# Altium PCB CAMERON.PcbDoc (part 1 of 2)
Units mil, origin at the board's own origin, x right, y up, seen from the top; angles counter-clockwise.
Board outline 6000 x 4900 mil, 4 copper layers (Top, POWER, GND, Bottom), stack 33.234 mil thick; 130 components, 113 nets, 631 pads, 154 vias.
Unrouted connection lines stored in the file: 5.
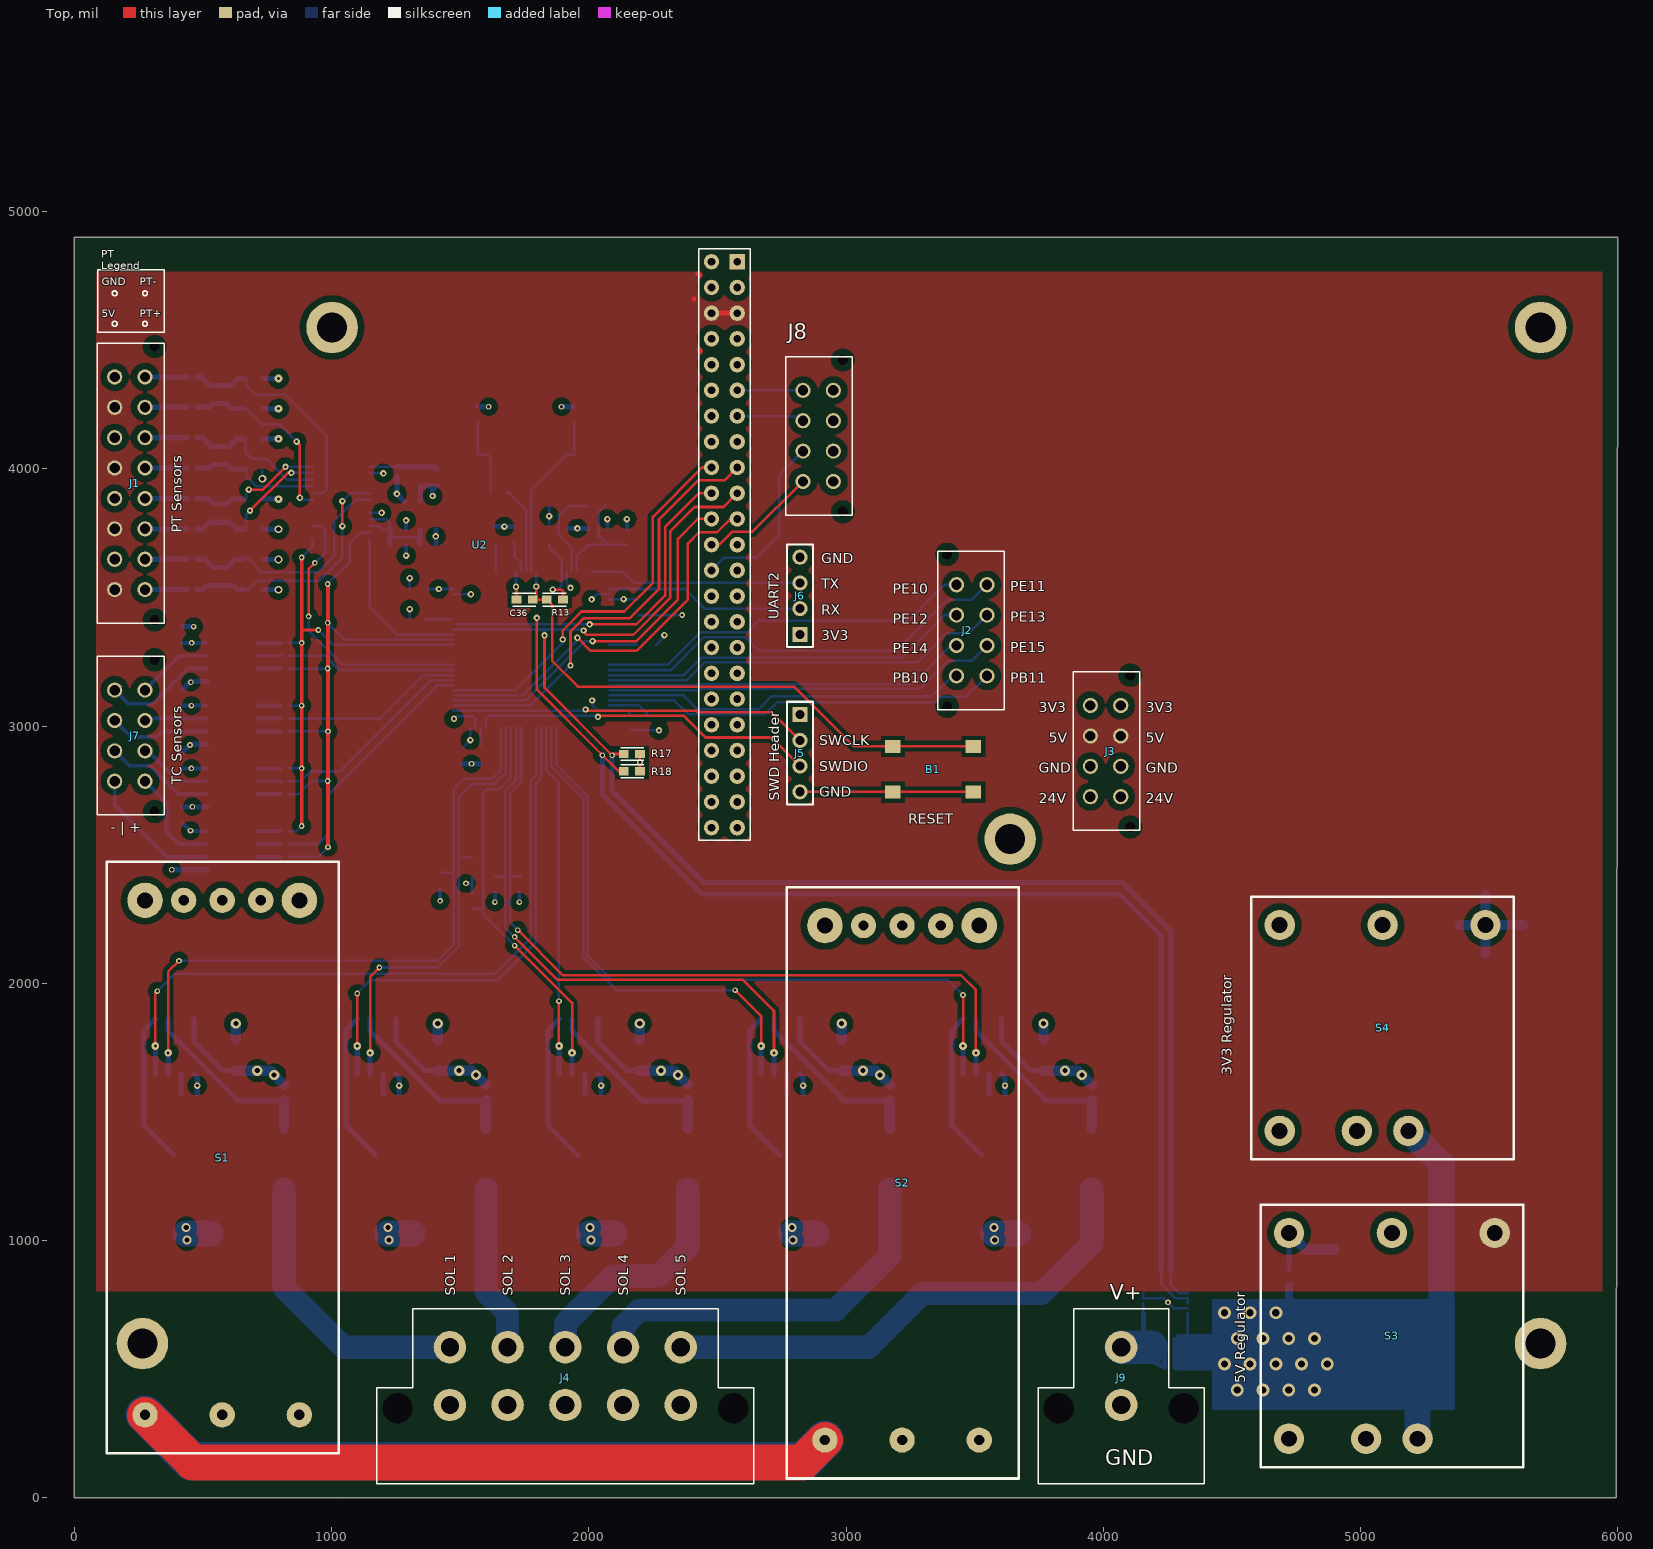
[diagram p0: Top view]
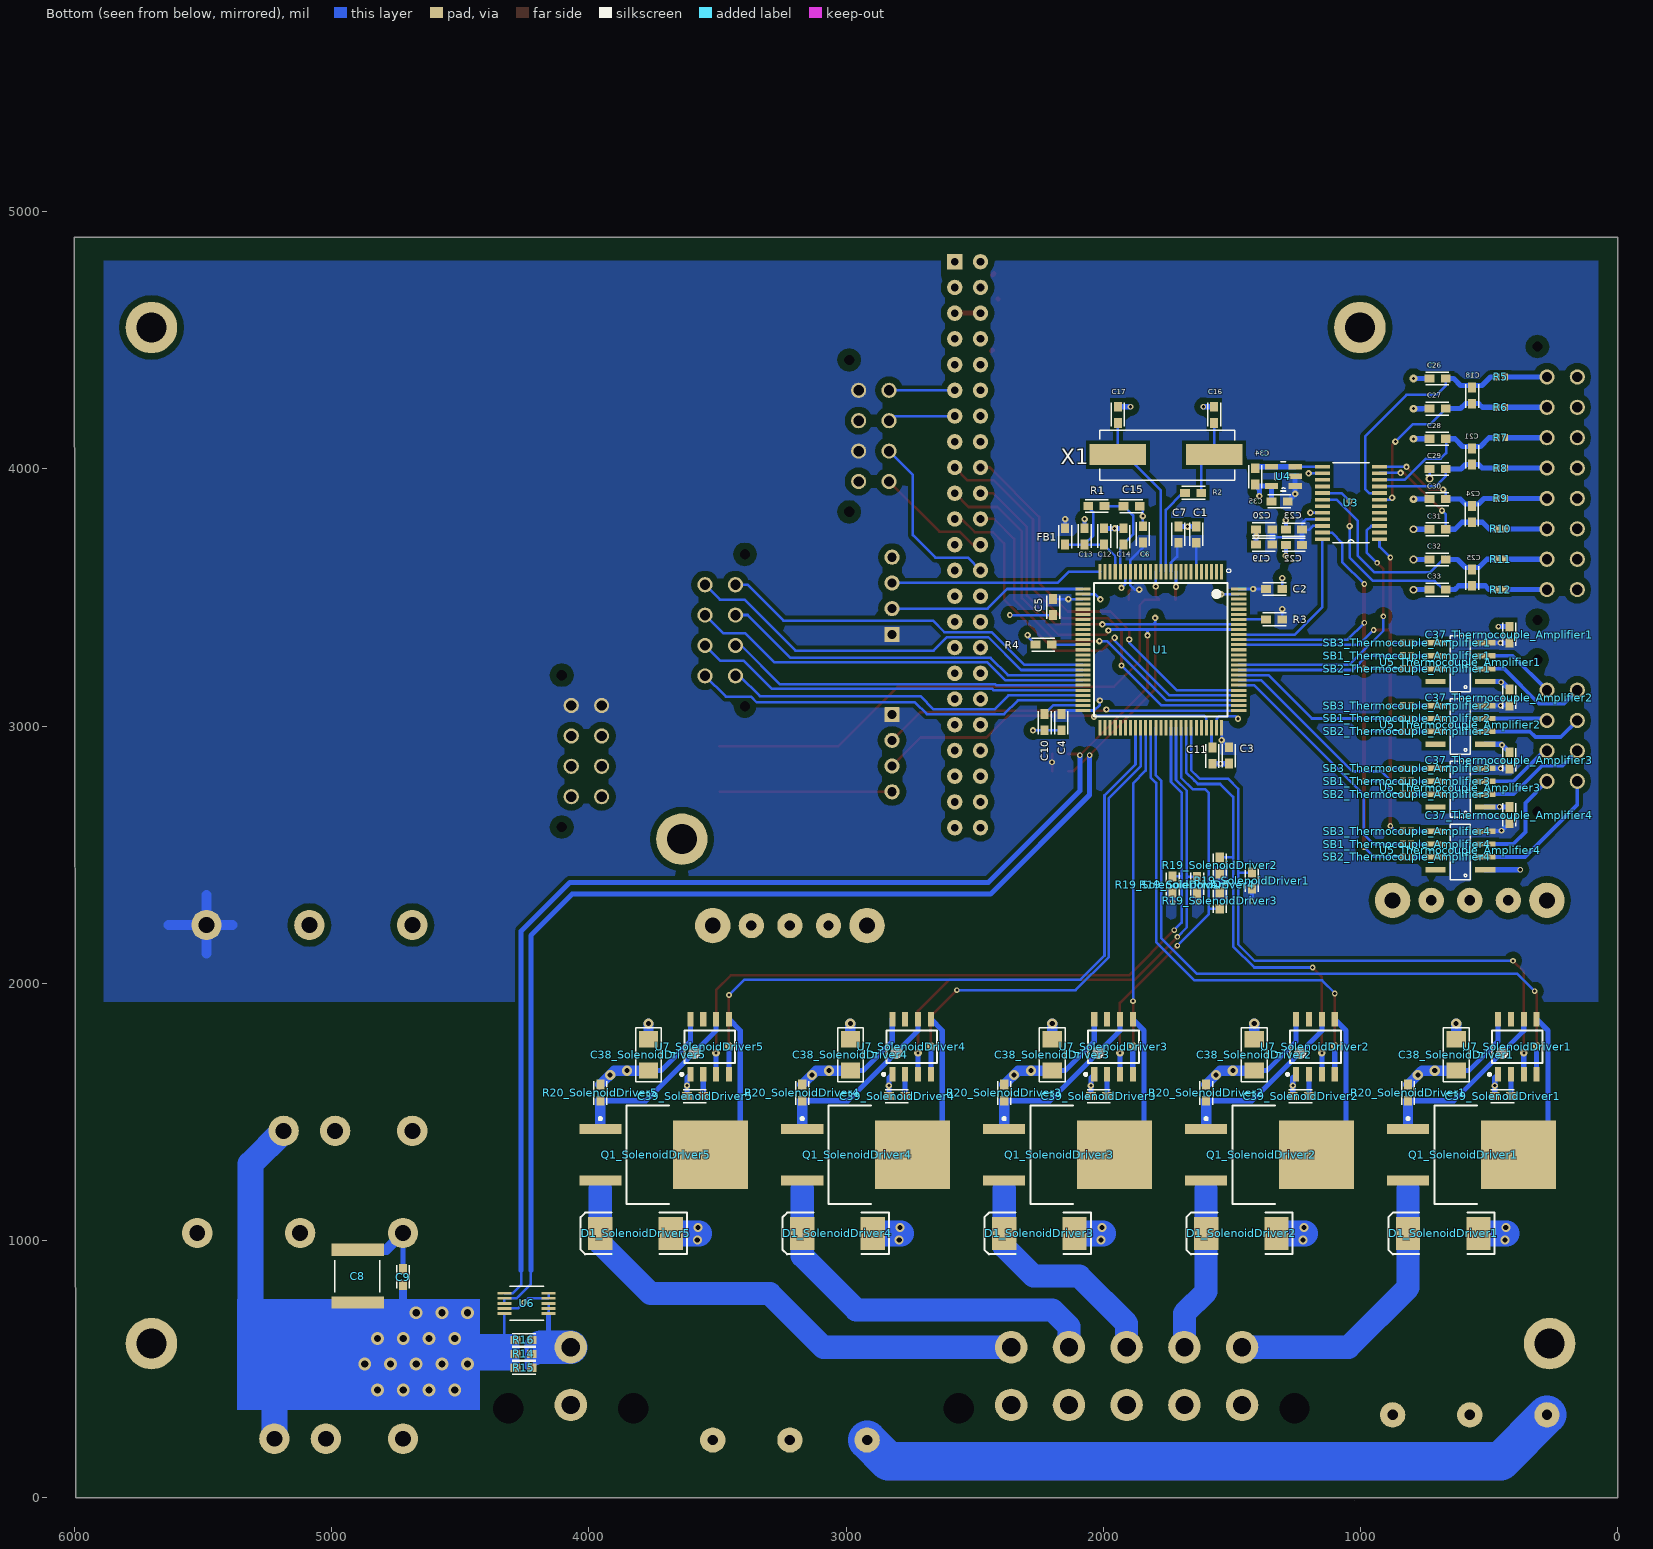
[diagram p1: Bottom view, seen from below]
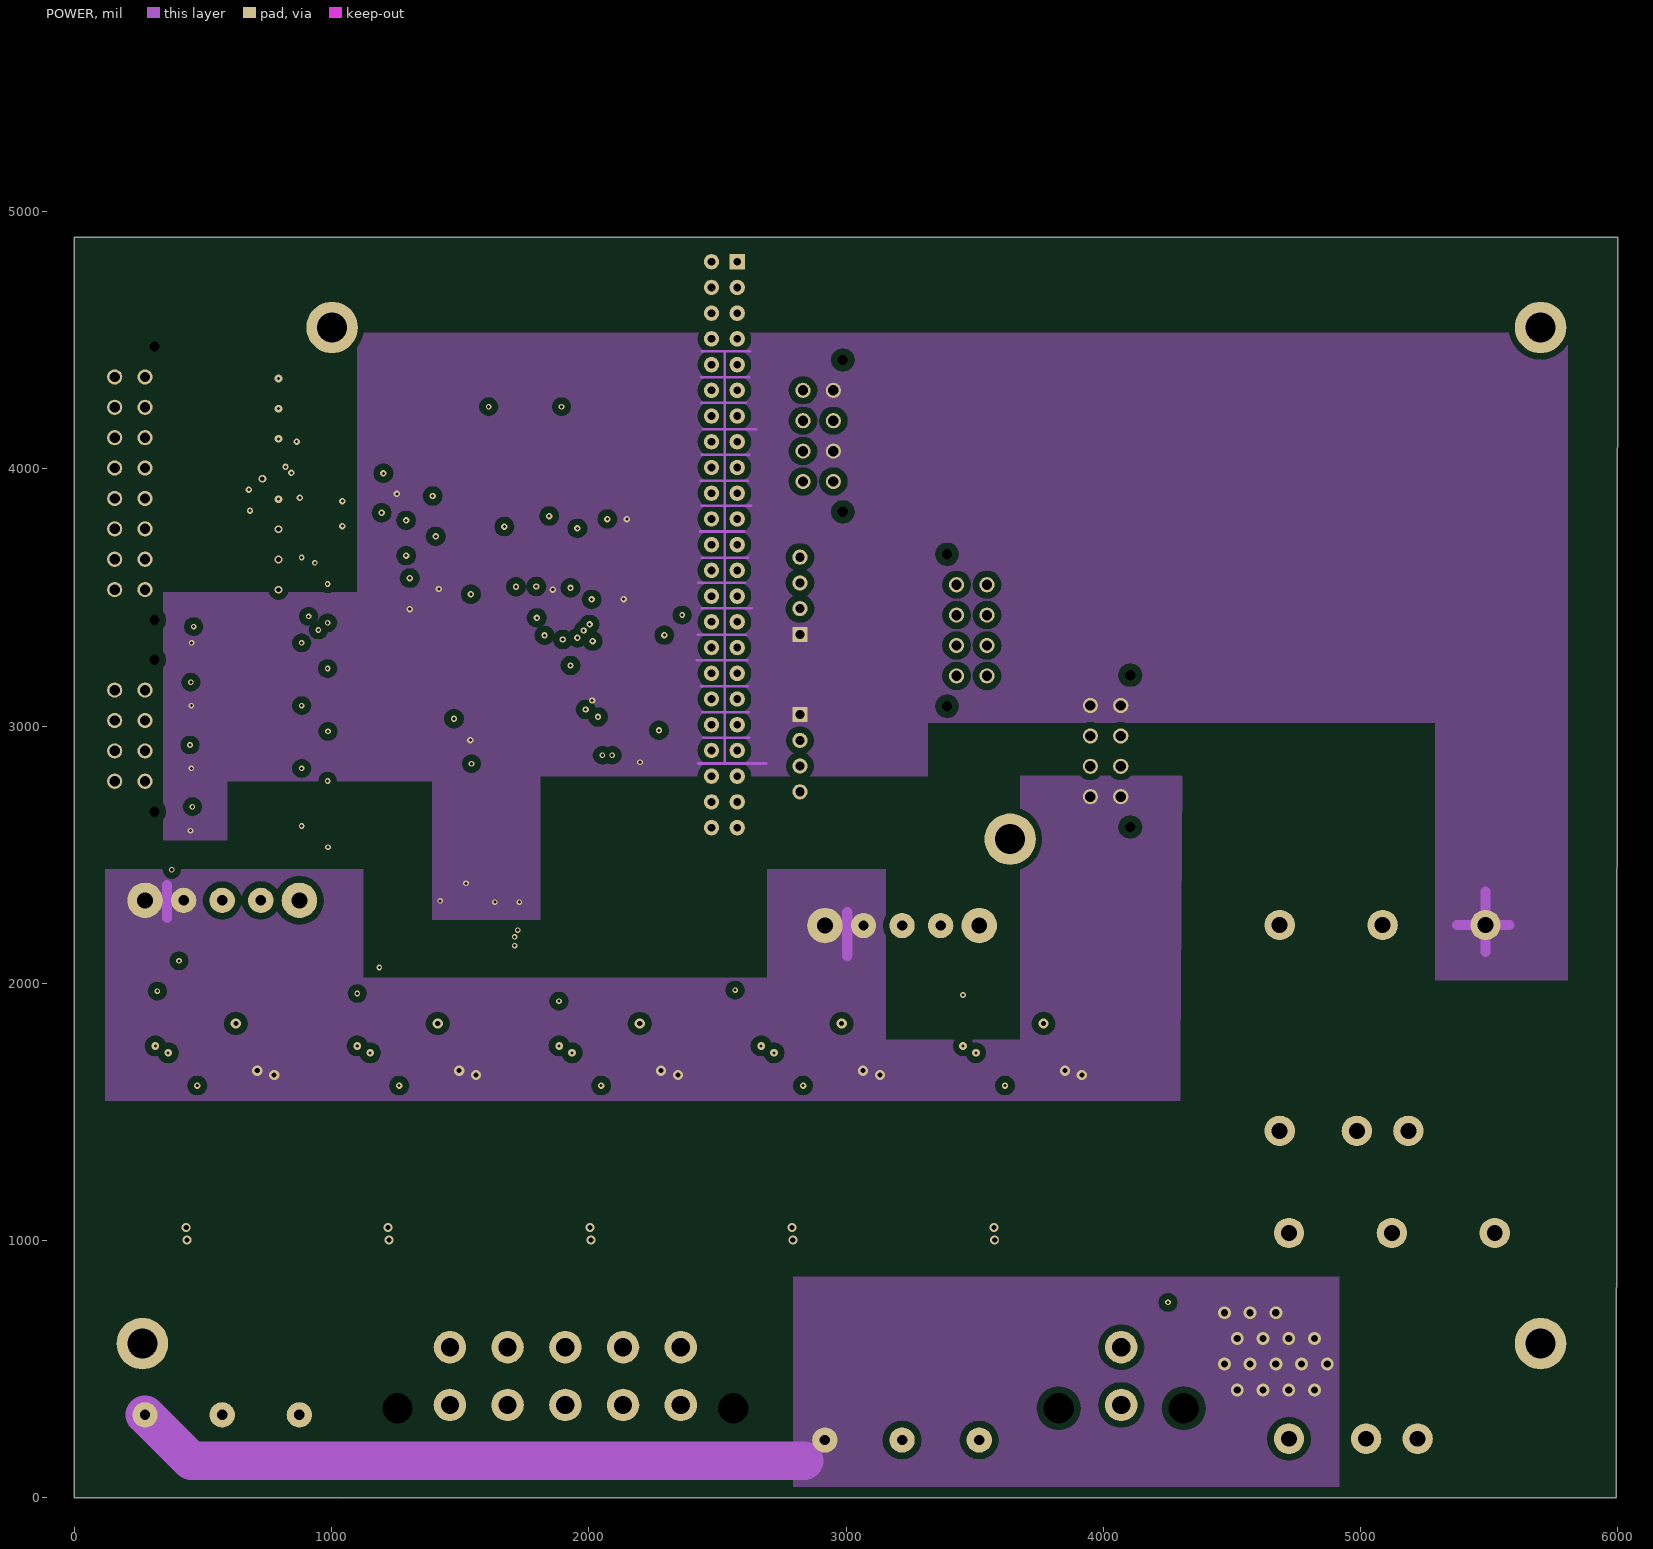
[diagram p2: POWER]
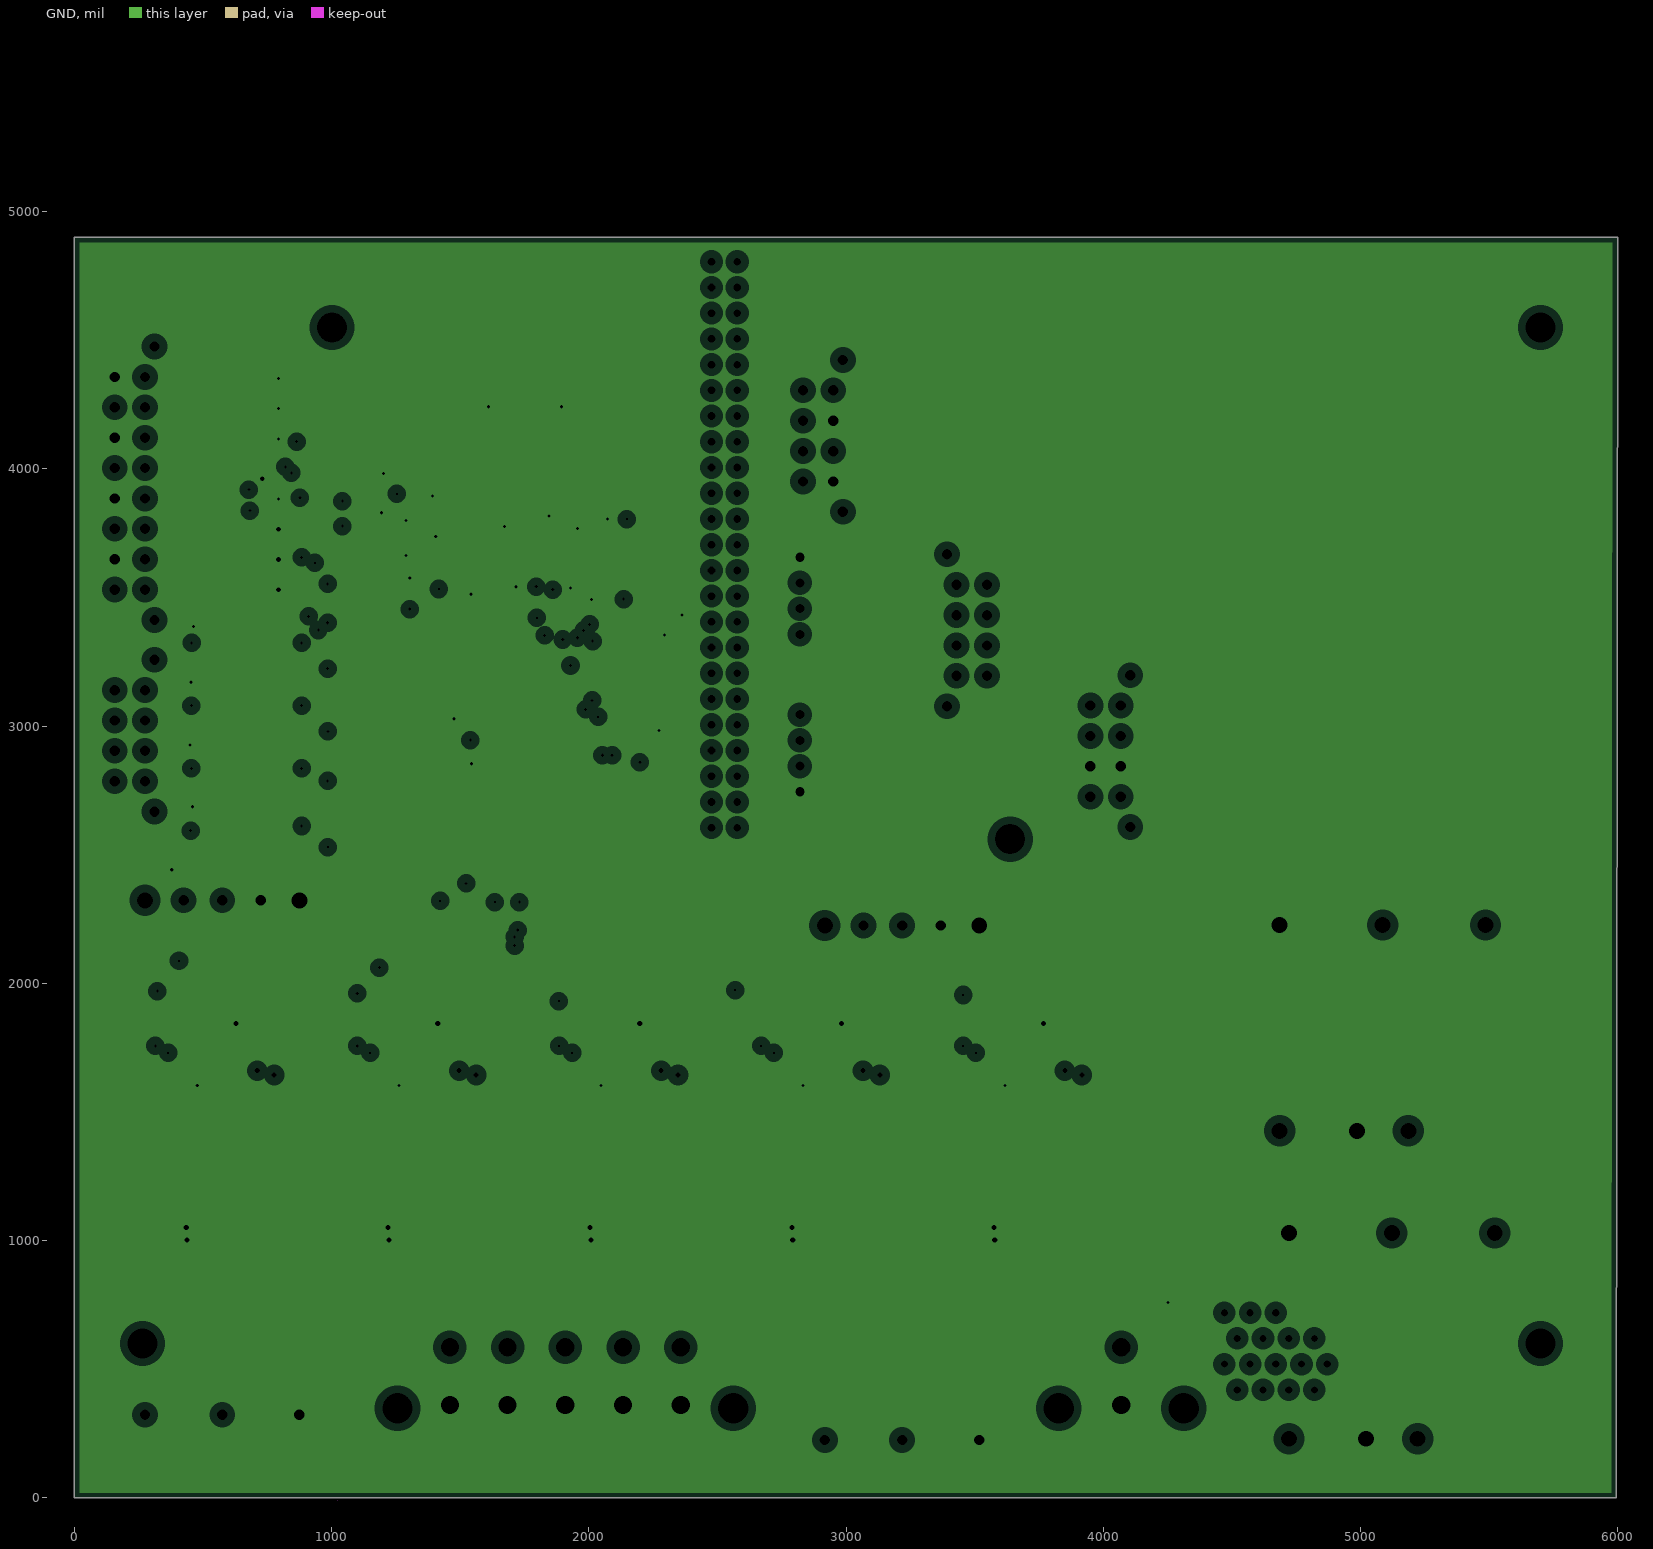
[diagram p3: GND, clearances drawn from the general rule]

## Layer stack, top to bottom
Top Solder: solder mask 0.4, Solder Resist, Dk 3.5
Top: signal copper 1.4
Dielectric 1: core 12.6, FR-4, Dk 4.8
POWER: signal copper 1.417
Dielectric 3: prepreg 5, Dk 4.2
GND: plane copper 1.417, net GND
Dielectric 2: core 10, Dk 4.2
Bottom: signal copper 1.4
Bottom Solder: solder mask 0.4, Solder Resist, Dk 3.5

## Board outline
0,0 0,4900 6000,4900 5995,0
cut-out: 1022,-12

## Design rules (kind name [scope] priority, off if disabled: settings)
Clearance "Stitching 3V3" [IsStitchingVia and InNet('3V3') vs (IsVia and (Not IsStitchingVia)) Or IsPad] p1: gap=5 ignorepadtopadclearanceinfootprint=FALSE
Clearance PolygonClearance [InPolygon] p2: gap=15 ignorepadtopadclearanceinfootprint=TRUE except(25: THPad-Fill THPad-Poly THPad-Region Via-Fill Via-Poly Via-Region Fill-Hole Poly-Hole Region-Hole)
Clearance [All] p3: gap=5 ignorepadtopadclearanceinfootprint=TRUE except(7: SMDPad-Fill SMDPad-Poly SMDPad-Region; 8: Arc-Fill Arc-Poly Arc-Region Track-Fill Track-Poly Track-Region Via-Fill Via-Poly Via-Region Fill-Fill Fill-Poly Fill-Region Poly-Poly Poly-Region Region-Region; 15: THPad-Fill THPad-Poly THPad-Region Fill-Hole Poly-Hole Region-Hole)
ComponentClearance [All] p1: gap=0 collisioncheckmode=3 verticalgap=0 showdistances=FALSE
HoleSize [All] p1: absolutevalues=TRUE maxlimit=250 minlimit=12 maxpercent=80.000 minpercent=20.000
MinimumAnnularRing [All] p1: minimumring=5
MinimumSolderMaskSliver [All] p1 off: minsoldermaskwidth=5
NetsToIgnore [InNetClass('SOL_FAULT[1..5]')  and InNetClass('SOL_OUT[1..5]')] p1:
PlaneClearance [All] p1: clearance=30
PlaneConnect PlaneConnect_GND [InNet('GND')] p1: planeconnectstyle=Direct reliefexpansion=20 reliefentries=4 reliefconductorwidth=40 reliefairgap=20
PlaneConnect [All] p2: planeconnectstyle=Direct reliefexpansion=20 reliefentries=4 reliefconductorwidth=30 reliefairgap=20
PolygonConnect PolygonConnect_3V3 [InNet('3V3')] p1: connectstyle=Direct reliefconductorwidth=20 reliefentries=4 polygonreliefangle="90 Angle" airgapwidth=10
PolygonConnect PolygonConnect_3V3_1 [Not InNet('3V3') vs InNet('3V3')] p2: thpad.connectstyle=Direct thpad.reliefconductorwidth=20 thpad.reliefentries=4 thpad.polygonreliefangle="90 Angle" thpad.airgapwidth=10 smdpad.connectstyle=Relief smdpad.reliefconductorwidth=20 smdpad.reliefentries=4 smdpad.polygonreliefangle="90 Angle" smdpad.airgapwidth=10 via.connectstyle=Relief via.reliefconductorwidth=20 via.reliefentries=4 via.polygonreliefangle="90 Angle" via.airgapwidth=10
PolygonConnect [Not InNet('3V3')] p3: connectstyle=Direct reliefconductorwidth=30 reliefentries=4 polygonreliefangle="90 Angle" airgapwidth=15
RoomDefinition SolenoidDriver5 [InComponentClass('SolenoidDriver5')] p1: confinementstyle=ConfineIn formatcopy=TRUE lockcomponents=FALSE outline 4101.13,2101.28 3326.13,2101.28 3326.13,873.28 4101.13,873.28
RoomDefinition SolenoidDriver4 [InComponentClass('SolenoidDriver4')] p2: confinementstyle=ConfineIn formatcopy=TRUE lockcomponents=FALSE outline 3316.13,2101.28 2541.13,2101.28 2541.13,873.28 3316.13,873.28
RoomDefinition SolenoidDriver3 [InComponentClass('SolenoidDriver3')] p3: confinementstyle=ConfineIn formatcopy=TRUE lockcomponents=FALSE outline 2531.13,2101.28 1756.13,2101.28 1756.13,873.28 2531.13,873.28
RoomDefinition SolenoidDriver2 [InComponentClass('SolenoidDriver2')] p4: confinementstyle=ConfineIn formatcopy=TRUE lockcomponents=FALSE outline 1746.13,2101.28 971.13,2101.28 971.13,873.28 1746.13,873.28
RoomDefinition SolenoidDriver1 [InComponentClass('SolenoidDriver1')] p5: confinementstyle=ConfineIn formatcopy=TRUE lockcomponents=FALSE outline 961.13,2101.28 186.13,2101.28 186.13,873.28 961.13,873.28
RoutingVias [All] p1: holewidth=10 width=15 viastyle="Through Hole" minholewidth=8 minwidth=12 maxholewidth=50 maxwidth=100
SilkToSilkClearance [All] p1: silktosilkclearance=1
SilkToSolderMaskClearance [IsPad] p1: minsilkscreentomaskgap=5 clearancetoexposedcopper=TRUE
SolderMaskExpansion [All] p1: expansion=5
UnRoutedNet [All] p1: checkbadconnections=TRUE
Width [All] p1: maxlimit=200 minlimit=5 preferedwidth=10
22 further rules are at their usual default settings.

## Classes and differential pairs
component class Recovery: J2 J3
net class SOL_PWR[1..5]: SOL_PWR1 SOL_PWR2 SOL_PWR3 SOL_PWR4 SOL_PWR5
net class SOL_OUT[1..5]: SOL_OUT1 SOL_OUT2 SOL_OUT3 SOL_OUT4 SOL_OUT5
net class SOL_FAULT[1..5]: SOL_FAULT1 SOL_FAULT2 SOL_FAULT3 SOL_FAULT4 SOL_FAULT5
component class Solenoids: J4
net class TC_CS[1..4]: TC_CS1 TC_CS2 TC_CS3 TC_CS4
net class T-[1..4]: T-1 T-2 T-3 T-4
net class T+[1..4]: T+1 T+2 T+3 T+4
channel class Solenoid_Driver: SolenoidDriver1 SolenoidDriver2 SolenoidDriver3 SolenoidDriver4 SolenoidDriver5 SolenoidDriver6 SolenoidDriver7
component class "XBee Radio": J8
component class Debugging/Programming: B1 C36 J5 J6 R13
component class SolenoidDriver5: C38_SolenoidDriver5 C39_SolenoidDriver5 D1_SolenoidDriver5 Q1_SolenoidDriver5 R19_SolenoidDriver5 R20_SolenoidDriver5 R25 U5_SolenoidDriver5 U7_SolenoidDriver5
component class SolenoidDriver4: C38_SolenoidDriver4 C39_SolenoidDriver4 D1_SolenoidDriver4 Q1_SolenoidDriver4 R19_SolenoidDriver4 R20_SolenoidDriver4 R25 U5_SolenoidDriver4 U7_SolenoidDriver4
component class SolenoidDriver3: C38_SolenoidDriver3 C39_SolenoidDriver3 D1_SolenoidDriver3 Q1_SolenoidDriver3 R19_SolenoidDriver3 R20_SolenoidDriver3 R25 U5_SolenoidDriver3 U7_SolenoidDriver3
component class SolenoidDriver2: C38_SolenoidDriver2 C39_SolenoidDriver2 D1_SolenoidDriver2 Q1_SolenoidDriver2 R19_SolenoidDriver2 R20_SolenoidDriver2 R25 U5_SolenoidDriver2 U7_SolenoidDriver2
component class SolenoidDriver1: C38_SolenoidDriver1 C39_SolenoidDriver1 D1_SolenoidDriver1 Q1_SolenoidDriver1 R19_SolenoidDriver1 R20_SolenoidDriver1 R25 U5_SolenoidDriver1 U7_SolenoidDriver1
component class RIO_MCU: U1
component class "Pressure Transducers": C18 C19 C20 C21 C22 C23 C24 C25 C26 C27 C28 C29 C30 C31 C32 C33 C34 C35 J1 R5 R6 R7 R8 R9 R10 R11 R12 U3 U4
component class Power_Monitor: J9 R14 R15 R16 R17 R18 U6
component class "Flight Computer": U2
channel class Thermocouple_Amplifier: Thermocouple_Amplifier1 Thermocouple_Amplifier2 Thermocouple_Amplifier3 Thermocouple_Amplifier4
component class Thermocouple_Amplifier4: C37_Thermocouple_Amplifier4 C? SB1_Thermocouple_Amplifier4 SB2_Thermocouple_Amplifier4 SB3_Thermocouple_Amplifier4 U5_Thermocouple_Amplifier4
component class Thermocouple_Amplifier3: C37_Thermocouple_Amplifier3 C? SB1_Thermocouple_Amplifier3 SB2_Thermocouple_Amplifier3 SB3_Thermocouple_Amplifier3 U5_Thermocouple_Amplifier3
component class Thermocouple_Amplifier2: C37_Thermocouple_Amplifier2 C? SB1_Thermocouple_Amplifier2 SB2_Thermocouple_Amplifier2 SB3_Thermocouple_Amplifier2 U5_Thermocouple_Amplifier2
component class Thermocouple_Amplifier1: C37_Thermocouple_Amplifier1 C? SB1_Thermocouple_Amplifier1 SB2_Thermocouple_Amplifier1 SB3_Thermocouple_Amplifier1 U5_Thermocouple_Amplifier1
component class Thermocouples: J7
component class Power: C1 C2 C3 C4 C5 C6 C7 C8 C9 C10 C11 C12 C13 C14 C15 C16 C17 FB1 R1 R2 R3 R4 S1 S2 S3 S4 X1

## Components (designator, comment, footprint, x,y, rotation, side; value= is the part's Value field where it differs from the comment)
B1 "Push Button" PUSHBUTTON 3182.01,2921 r0 top
C1 "" 0603 1638.26,3776 r270 bottom value=1uF
C2 "" 0603 1304.13,3533.37 r0 bottom value=100nF
C3 "" 0603 1511.78,2855 r90 bottom value=100nF
C4 "" 0603 2163,2984 r90 bottom value=100nF
C5 "" 0603 2195,3432 r90 bottom value=100nF
C6 "" 0603 1846,3777 r270 bottom value=100nF
C7 "" 0603 1708,3776 r270 bottom value=100nF
C8 "Cap" 2220 4898,964.72 r270 bottom value=10uF
C9 "Cap" 0603 4722,890 r270 bottom value=0.1uF
C10 "" 0603 2228,2984 r90 bottom value=2.2uF
C11 "" 0603 1576,2854 r90 bottom value=2.2uF
C12 "" 0603 1996.67,3769.13 r270 bottom value=100nF
C13 "" 0603 2072.33,3769.13 r270 bottom value=1uF
C14 "" 0603 1921.33,3706.13 r90 bottom value=100nF
C15 "" 0603 1921,3855 r180 bottom value=1uF
C16 "" 0603 1569,4242 r270 bottom value=25pF
C17 "" 0603 1943,4242 r270 bottom value=25pF
C18 "Cap" 0603 566,4253.91 r90 bottom value=0.1uF
C19 "Cap" 0603 1406,3706 r180 bottom value=0.1uF
C20 "Cap" 0603 1406,3765 r180 bottom value=0.1uF
C21 "Cap" 0603 566,4016.91 r90 bottom value=0.1uF
C22 "Cap" 0603 1290,3705 r180 bottom value=0.1uF
C23 "Cap" 0603 1290,3764 r180 bottom value=0.1uF
C24 "Cap" 0603 567,3792.77 r90 bottom value=0.1uF
C25 "Cap" 0603 566,3545.91 r90 bottom value=0.1uF
C26 "Cap" 0603 731.31,4351.77 r180 bottom value=10pF
C27 "Cap" 0603 731.31,4234.52 r180 bottom value=10pF
C28 "Cap" 0603 731.31,4117.27 r180 bottom value=10pF
C29 "Cap" 0603 731.31,4000.01 r180 bottom value=10pF
C30 "Cap" 0603 731.31,3882.76 r180 bottom value=10pF
C31 "Cap" 0603 731.31,3765.51 r180 bottom value=10pF
C32 "Cap" 0603 731.31,3648.25 r180 bottom value=10pF
C33 "Cap" 0603 731.31,3531 r180 bottom value=10pF
C34 "Cap" 0603 1409,3940 r90 bottom value=0.1uF
C35 "Cap" 0603 1346,3874 r180 bottom value=0.1uF
C36 "Cap" 0603 1719,3492 r0 top value=100nF
C37_Thermocouple_Amplifier1 "Cap" 0603 421,3387 r270 bottom value=100nF (schematic designator C37)
C37_Thermocouple_Amplifier2 "Cap" 0603 421,3143 r270 bottom value=100nF (schematic designator C37)
C37_Thermocouple_Amplifier3 "Cap" 0603 421,2899 r270 bottom value=100nF (schematic designator C37)
C37_Thermocouple_Amplifier4 "Cap" 0603 421,2686 r270 bottom value=100nF (schematic designator C37)
C38_SolenoidDriver1 "Cap" 1206 628,1783 r270 bottom value=10uF (schematic designator C38)
C38_SolenoidDriver2 "Cap" 1206 1413,1783 r270 bottom value=10uF (schematic designator C38)
C38_SolenoidDriver3 "Cap" 1206 2198,1783 r270 bottom value=10uF (schematic designator C38)
C38_SolenoidDriver4 "Cap" 1206 2983,1783 r270 bottom value=10uF (schematic designator C38)
C38_SolenoidDriver5 "Cap" 1206 3768,1783 r270 bottom value=10uF (schematic designator C38)
C39_SolenoidDriver1 "Cap" 0603 478,1562 r180 bottom value=1uF (schematic designator C39)
C39_SolenoidDriver2 "Cap" 0603 1263,1562 r180 bottom value=1uF (schematic designator C39)
C39_SolenoidDriver3 "Cap" 0603 2048,1562 r180 bottom value=1uF (schematic designator C39)
C39_SolenoidDriver4 "Cap" 0603 2833,1562 r180 bottom value=1uF (schematic designator C39)
C39_SolenoidDriver5 "Cap" 0603 3618,1562 r180 bottom value=1uF (schematic designator C39)
D1_SolenoidDriver1 "Diode" SMC 678.25,1028 r0 bottom (schematic designator D1)
D1_SolenoidDriver2 "Diode" SMC 1463.25,1028 r0 bottom (schematic designator D1)
D1_SolenoidDriver3 "Diode" SMC 2248.25,1028 r0 bottom (schematic designator D1)
D1_SolenoidDriver4 "Diode" SMC 3033.25,1028 r0 bottom (schematic designator D1)
D1_SolenoidDriver5 "Diode" SMC 3818.25,1028 r0 bottom (schematic designator D1)
FB1 "Ferrite Bead" 0603 2148,3706.13 r90 bottom
J1 "MicroFit 16-Pos Connector" Microfit-16Pos 275.11,3412.89 r270 top
J2 "MicroFit 8-Pos Connector" Microfit-8Pos 3355.87,3372.83 r90 top
J3 "MicroFit 8-Pos Connector" Microfit-8Pos 4142.13,2903.17 r270 top
J4 "MegaFit 10-Pos Connector" MegaFit-10Pos 2503.09,736.02 r180 top
J5 "Header 4" HDR1X4 2821,3045 r270 top
J6 "Header 4" HDR1X4 2821,3357 r90 top
J7 "MicroFit 8-Pos Connector" Microfit-8Pos 349.13,2963.17 r270 top
J8 "MicroFit 8-Pos Connector" Microfit-8Pos 3024.84,4128.51 r270 top
J9 "Mega-Fit 2Pos Connector" MegaFit-2Pos 4069.91,361.42 r180 top
Q1_SolenoidDriver1 "MOSFET-N" DPAK2 569,1334 r180 bottom (schematic designator Q1)
Q1_SolenoidDriver2 "MOSFET-N" DPAK2 1354,1334 r180 bottom (schematic designator Q1)
Q1_SolenoidDriver3 "MOSFET-N" DPAK2 2139,1334 r180 bottom (schematic designator Q1)
Q1_SolenoidDriver4 "MOSFET-N" DPAK2 2924,1334 r180 bottom (schematic designator Q1)
Q1_SolenoidDriver5 "MOSFET-N" DPAK2 3709,1334 r180 bottom (schematic designator Q1)
R1 "Res1" 0603 1995.13,3856 r0 bottom value=47
R2 "Res1" 0603 1619,3907 r0 bottom value=787
R3 "Res1" 0603 1304.13,3415.26 r0 bottom value=4.7k
R4 "Res1" 0603 2263,3316.83 r180 bottom value=4.7k
R5 "Res" SB-2pos 458.31,4357.77 r0 bottom value=0R
R6 "Res" SB-2pos 458.31,4239.66 r0 bottom value=0R
R7 "Res" SB-2pos 458.31,4121.55 r0 bottom value=0R
R8 "Res" SB-2pos 458.31,4003.44 r0 bottom value=0R
R9 "Res" SB-2pos 458.31,3885.33 r0 bottom value=0R
R10 "Res" SB-2pos 458.31,3767.22 r0 bottom value=0R
R11 "Res" SB-2pos 458.31,3649.11 r0 bottom value=0R
R12 "Res" SB-2pos 458.31,3531 r0 bottom value=0R
R13 "Res1" 0603 1837,3492 r0 top value=4.7K
R14 "Res" 0603 4222,560 r0 bottom value=0.06R
R15 "Res" 0603 4222,506 r0 bottom value=0.06R
R16 "Res" 0603 4222,614 r0 bottom value=0.06R
R17 "Res" 0603 2199,2892 r180 top value=4.7K
R18 "Res" 0603 2199,2825 r180 top value=4.7K
R19_SolenoidDriver1 "Res1" 0603 1422,2431 r270 bottom value=4.7K (schematic designator R19)
R19_SolenoidDriver2 "Res1" 0603 1547,2490 r270 bottom value=4.7K (schematic designator R19)
R19_SolenoidDriver3 "Res1" 0603 1547,2290 r90 bottom value=4.7K (schematic designator R19)
R19_SolenoidDriver4 "Res1" 0603 1635,2415 r270 bottom value=4.7K (schematic designator R19)
R19_SolenoidDriver5 "Res1" 0603 1730,2416 r270 bottom value=4.7K (schematic designator R19)
R20_SolenoidDriver1 "Res1" 0603 815,1544 r90 bottom value=0.05 (schematic designator R20)
R20_SolenoidDriver2 "Res1" 0603 1600,1544 r90 bottom value=0.05 (schematic designator R20)
R20_SolenoidDriver3 "Res1" 0603 2385,1544 r90 bottom value=0.05 (schematic designator R20)
R20_SolenoidDriver4 "Res1" 0603 3170,1544 r90 bottom value=0.05 (schematic designator R20)
R20_SolenoidDriver5 "Res1" 0603 3955,1544 r90 bottom value=0.05 (schematic designator R20)
S1 "24V Buck Converter" UWE-24/3-Q12 575,1323 r90 top locked
S2 "24V Buck Converter" UWE-24/3-Q12 3218,1225 r90 top locked
S3 "5V Buck Converter" SPM15-050-Q12P-C 5122,630 r90 top
S4 "3V3 Buck Converter" SPM15-033-Q48N-C 5086,1827 r90 top
SB1_Thermocouple_Amplifier1 "Solder Bridge" SB-2pos 822.87,3274 r0 bottom (schematic designator SB1)
SB1_Thermocouple_Amplifier2 "Solder Bridge" SB-2pos 822.87,3030 r0 bottom (schematic designator SB1)
SB1_Thermocouple_Amplifier3 "Solder Bridge" SB-2pos 822.87,2786 r0 bottom (schematic designator SB1)
SB1_Thermocouple_Amplifier4 "Solder Bridge" SB-2pos 822.87,2542 r0 bottom (schematic designator SB1)
SB2_Thermocouple_Amplifier1 "Solder Bridge" SB-2pos 822.87,3224 r0 bottom (schematic designator SB2)
SB2_Thermocouple_Amplifier2 "Solder Bridge" SB-2pos 822.87,2980 r0 bottom (schematic designator SB2)
SB2_Thermocouple_Amplifier3 "Solder Bridge" SB-2pos 822.87,2736 r0 bottom (schematic designator SB2)
SB2_Thermocouple_Amplifier4 "Solder Bridge" SB-2pos 822.87,2492 r0 bottom (schematic designator SB2)
SB3_Thermocouple_Amplifier1 "Solder Bridge" SB-2pos 822.87,3324 r0 bottom (schematic designator SB3)
SB3_Thermocouple_Amplifier2 "Solder Bridge" SB-2pos 822.87,3080 r0 bottom (schematic designator SB3)
SB3_Thermocouple_Amplifier3 "Solder Bridge" SB-2pos 822.87,2836 r0 bottom (schematic designator SB3)
SB3_Thermocouple_Amplifier4 "Solder Bridge" SB-2pos 822.87,2592 r0 bottom (schematic designator SB3)
U1 "STM32F407xx" LQFP100 1776.06,3297.15 r270 bottom locked
U2 "BeagleBone Black" BeagleBoneBlack 1378,3731 r270 top locked
U3 "AD7794BRUZ" RU_24 1037,3868 r0 bottom value=Value
U4 "ADR391AUJZ-R2" UJ_5 1300,3971.35 r0 bottom value=Value
U5_Thermocouple_Amplifier1 "Thermocouple to Digital Converter" "8-SOIC MAXIM" 612,3174 r0 bottom (schematic designator U5)
U5_Thermocouple_Amplifier2 "Thermocouple to Digital Converter" "8-SOIC MAXIM" 612,2930 r0 bottom (schematic designator U5)
U5_Thermocouple_Amplifier3 "Thermocouple to Digital Converter" "8-SOIC MAXIM" 612,2686 r0 bottom (schematic designator U5)
U5_Thermocouple_Amplifier4 "Thermocouple to Digital Converter" "8-SOIC MAXIM" 612,2442 r0 bottom (schematic designator U5)
U6 "LTC4151IMS-1#PBF" MSOP-10_MS 4242,756.32 r0 bottom value=Value
U7_SolenoidDriver1 "MOSFET Driver" PSO-8 390,1754 r90 bottom value=Value (schematic designator U7)
U7_SolenoidDriver2 "MOSFET Driver" PSO-8 1175,1754 r90 bottom value=Value (schematic designator U7)
U7_SolenoidDriver3 "MOSFET Driver" PSO-8 1960,1754 r90 bottom value=Value (schematic designator U7)
U7_SolenoidDriver4 "MOSFET Driver" PSO-8 2745,1754 r90 bottom value=Value (schematic designator U7)
U7_SolenoidDriver5 "MOSFET Driver" PSO-8 3530,1754 r90 bottom value=Value (schematic designator U7)
X1 "XTAL" OSC_8MHz 1569,4056 r0 bottom

## Footprints (in the part's own frame and the unit in brackets; to place one, negate y for a bottom-side part, rotate by r counter-clockwise, add the part's x,y. Pads: shape width x height; smd on the part's side, far side on the other; paste and mask are expansions set on the pad)
"8-SOIC MAXIM" [mm] "Thermocouple Amplifier, Maxim Land Pattern 90-0096"
  rect 1.98x0.53 smd: 1(-2.465,0) 2(-2.465,-1.27) 3(-2.465,-2.54) 4(-2.465,-3.81) 5(2.465,-3.81) 6(2.465,-2.54) 7(2.465,-1.27) 8(2.465,0)
  silkscreen extent -1,-4.5 1,1
0603 [mil]
  rect 38x31.5 smd: 1(0,0) 2(63,0)
  silkscreen extent -15,-25 75,25
1206 [mm]
  rect 1.6x1.9 smd: 1(0,0) 2(3.1,0)
  silkscreen extent -1.14,-1.27 4.19,1.27
2220 [mm]
  rect 1.2x5.2 smd: 1(0,0) 2(5.2,0)
  silkscreen extent 1.02,-2.29 4.19,2.16
BeagleBoneBlack [mil]
  rect 60x60 hole 30 mask+2: 1(-1074.67,1199.13)
  round 60 hole 30 mask+2: 2(-1074.67,1099.13) 3(-974.67,1199.13) 4(-974.67,1099.13) 5(-874.67,1199.13) 6(-874.67,1099.13) 7(-774.67,1199.13) 8(-774.67,1099.13) 9(-674.67,1199.13) 10(-674.67,1099.13) 11(-574.67,1199.13) 12(-574.67,1099.13) 13(-474.67,1199.13) 14(-474.67,1099.13) 15(-374.67,1199.13) 16(-374.67,1099.13) 17(-274.67,1199.13) 18(-274.67,1099.13) 19(-174.67,1199.13) 20(-174.67,1099.13) 21(-74.67,1199.13) 22(-74.67,1099.13) 23(25.33,1199.13) 24(25.33,1099.13) 25(125.33,1199.13) 26(125.33,1099.13) 27(225.33,1199.13) 28(225.33,1099.13) 29(325.33,1199.13) 30(325.33,1099.13) 31(425.33,1199.13) 32(425.33,1099.13) 33(525.33,1199.13) 34(525.33,1099.13) 35(625.33,1199.13) 36(625.33,1099.13) 37(725.33,1199.13) 38(725.33,1099.13) 39(825.33,1199.13) 40(825.33,1099.13) 41(925.33,1199.13) 42(925.33,1099.13) 43(1025.33,1199.13) 44(1025.33,1099.13) 45(1125.33,1199.13) 46(1125.33,1099.13)
  rect 60x60 on Mech13 mask+2: NONE(-1074.67,-800.87)
  round 60 on Mech13 mask+2: NONE(-1074.67,-700.87) NONE(-974.67,-800.87) NONE(-974.67,-700.87) NONE(-874.67,-800.87) NONE(-874.67,-700.87) NONE(-774.67,-800.87) NONE(-774.67,-700.87) NONE(-674.67,-800.87) NONE(-674.67,-700.87) NONE(-574.67,-800.87) NONE(-574.67,-700.87) NONE(-474.67,-700.87) NONE(-474.67,-800.87) NONE(-374.67,-700.87) NONE(-374.67,-800.87) NONE(-274.67,-700.87) NONE(-274.67,-800.87) NONE(-174.67,-800.87) NONE(-174.67,-700.87) NONE(-74.67,-700.87) NONE(-74.67,-800.87) NONE(25.33,-700.87) NONE(25.33,-800.87) NONE(125.33,-700.87) NONE(125.33,-800.87) NONE(225.33,-800.87) NONE(225.33,-700.87) NONE(325.33,-700.87) NONE(325.33,-800.87) NONE(425.33,-700.87) NONE(425.33,-800.87) NONE(525.33,-800.87) NONE(525.33,-700.87) NONE(625.33,-800.87) NONE(625.33,-700.87) NONE(725.33,-800.87) NONE(725.33,-700.87) NONE(825.33,-800.87) NONE(825.33,-700.87) NONE(925.33,-800.87) NONE(925.33,-700.87) NONE(1025.33,-800.87) NONE(1025.33,-700.87) NONE(1125.33,-800.87) NONE(1125.33,-700.87)
  silkscreen extent -1125,1049 1175,1249
DPAK2 [mm] "D2-PAK, 3-Pads, Body 7.93x8.19mm (max), IPC Medium Density"
  rect 4.15x0.95 smd: 1(-6.25,2.54) 3(-6.25,-2.54)
  rect 7.4x6.8 smd: 2(4.65,0)
  silkscreen extent -6.38,-4.85 0.55,4.85, body extent -3.65,-4.82 6,4.82, height 4.83
HDR1X4 [mm] "Connector; Header; 4 Position"
  rect 1.5x1.5 hole 0.9: 1(0,0)
  round 1.5 hole 0.9: 2(2.54,0) 3(5.08,0) 4(7.62,0)
  silkscreen extent -1.27,-1.27 8.89,1.27
LQFP100 [mm]
  rect 1.5x0.3 smd: 1(-7.7,6) 2(-7.7,5.5) 3(-7.7,5) 4(-7.7,4.5) 5(-7.7,4) 6(-7.7,3.5) 7(-7.7,3) 8(-7.7,2.5) 9(-7.7,2) 10(-7.7,1.5) 11(-7.7,1) 12(-7.7,0.5) 13(-7.7,0) 14(-7.7,-0.5) 15(-7.7,-1) 16(-7.7,-1.5) 17(-7.7,-2) 18(-7.7,-2.5) 19(-7.7,-3) 20(-7.7,-3.5) 21(-7.7,-4) 22(-7.7,-4.5) 23(-7.7,-5) 24(-7.7,-5.5) 25(-7.7,-6) 51(7.7,-6) 52(7.7,-5.5) 53(7.7,-5) 54(7.7,-4.5) 55(7.7,-4) 56(7.7,-3.5) 57(7.7,-3) 58(7.7,-2.5) 59(7.7,-2) 60(7.7,-1.5) 61(7.7,-1) 62(7.7,-0.5) 63(7.7,0) 64(7.7,0.5) 65(7.7,1) 66(7.7,1.5) 67(7.7,2) 68(7.7,2.5) 69(7.7,3) 70(7.7,3.5) 71(7.7,4) 72(7.7,4.5) 73(7.7,5) 74(7.7,5.5) 75(7.7,6)
  rect 0.3x1.5 smd: 26(-6,-7.7) 27(-5.5,-7.7) 28(-5,-7.7) 29(-4.5,-7.7) 30(-4,-7.7) 31(-3.5,-7.7) 32(-3,-7.7) 33(-2.5,-7.7) 34(-2,-7.7) 35(-1.5,-7.7) 36(-1,-7.7) 37(-0.5,-7.7) 38(0,-7.7) 39(0.5,-7.7) 40(1,-7.7) 41(1.5,-7.7) 42(2,-7.7) 43(2.5,-7.7) 44(3,-7.7) 45(3.5,-7.7) 46(4,-7.7) 47(4.5,-7.7) 48(5,-7.7) 49(5.5,-7.7) 50(6,-7.7) 76(6,7.7) 77(5.5,7.7) 78(5,7.7) 79(4.5,7.7) 80(4,7.7) 81(3.5,7.7) 82(3,7.7) 83(2.5,7.7) 84(2,7.7) 85(1.5,7.7) 86(1,7.7) 87(0.5,7.7) 88(0,7.7) 89(-0.5,7.7) 90(-1,7.7) 91(-1.5,7.7) 92(-2,7.7) 93(-2.5,7.7) 94(-3,7.7) 95(-3.5,7.7) 96(-4,7.7) 97(-4.5,7.7) 98(-5,7.7) 99(-5.5,7.7) 100(-6,7.7)
  silkscreen extent -8,-6.6 6.6,6.9
MegaFit-2Pos [mm] "Molex MegaFit-2Pos"
  round 3.2 hole 1.8: 1(0,-5.7) 2(0,0)
  round 1 hole 3 unplated: NONE(-6.17,0.325) NONE(6.17,0.325)
  silkscreen extent -8.2,-9.52 8.2,7.77
MegaFit-10Pos [mm] "Molex MegaFit-10Pos"
  round 3.2 hole 1.8: 1(3.69,3.815) 2(3.69,9.515) 3(9.39,3.815) 4(9.39,9.515) 5(15.09,3.815) 6(15.09,9.515) 7(20.79,3.815) 8(20.79,9.515) 9(26.49,3.815) 10(26.49,9.515)
  round 1 hole 3 unplated: NONE(-1.48,9.84) NONE(31.66,9.84)
  silkscreen extent -3.51,0 33.69,17.28
Microfit-8Pos [mm]
  round 1.5 hole 1.02 unplated: 1(-4.5,-4.88) 2(-4.5,-1.88) 3(-1.5,-4.88) 4(-1.5,-1.88) 5(1.5,-4.88) 6(1.5,-1.88) 7(4.5,-4.88) 8(4.5,-1.88)
  round 0 hole 1.02 unplated: NONE(-7.5,-0.94) NONE(7.5,-0.94)
  silkscreen extent -7.83,-6.58 7.83,0
Microfit-16Pos [mm]
  round 1.5 hole 1.02 unplated: 1(-24,-3) 2(-24,0) 3(-21,-3) 4(-21,0) 5(-18,-3) 6(-18,0) 7(-15,-3) 8(-15,0) 9(-12,-3) 10(-12,0) 11(-9,-3) 12(-9,0) 13(-6,-3) 14(-6,0) 15(-3,-3) 16(-3,0)
  round 0 hole 1.02 unplated: NONE(-27,0.94) NONE(0,0.94)
  silkscreen extent -27.32,-4.7 0.33,1.88
MSOP-10_MS [mil]
  rect 55x11 smd: 1(-86,39.4) 2(-86,19.7) 3(-86,0) 4(-86,-19.7) 5(-86,-39.4) 6(86,-39.4) 7(86,-19.7) 8(86,0) 9(86,19.7) 10(86,39.4)
  silkscreen extent -66,-66 66,66, body extent -99,-61 100,61, height 43
OSC_8MHz [mil]
  rect 220x83 smd: 1(0,0) 2(374,0)
  silkscreen extent -80,-95 445,100
PSO-8 [mm] "SOP, 8-Leads, Body 4.90x3.90mm, Pitch 1.27mm, IPC Medium Density"
  rect 1.45x0.6 smd: 1(-2.725,1.905) 2(-2.725,0.635) 3(-2.725,-0.635) 4(-2.725,-1.905) 5(2.725,-1.905) 6(2.725,-0.635) 7(2.725,0.635) 8(2.725,1.905)
  silkscreen extent -2.85,-2.5 1.6,2.88, body extent -3,-2.5 3,2.5, height 1.75
PUSHBUTTON [mm]
  rect 1.55x1.3 smd: 1(0,0) 1(7.95,0) 2(0,-4.5) 2(7.95,-4.5)
RU_24 [mil]
  rect 58x14 smd: 1(-111,140.75) 2(-111,115.16) 3(-111,89.57) 4(-111,63.98) 5(-111,38.39) 6(-111,12.8) 7(-111,-12.8) 8(-111,-38.39) 9(-111,-63.98) 10(-111,-89.57) 11(-111,-115.16) 12(-111,-140.75) 13(111,-140.75) 14(111,-115.16) 15(111,-89.57) 16(111,-63.98) 17(111,-38.39) 18(111,-12.8) 19(111,12.8) 20(111,38.39) 21(111,63.98) 22(111,89.57) 23(111,115.16) 24(111,140.75)
  silkscreen extent -72,-156 72,156, body extent -126,-156 126,156, height 47
SB-2pos [mm]
  rect 0.6x0.7 smd: 1(-0.5,0) 2(0.3,0)
SMC [mm] "DO-214-AB/SMC; 2 C-Bend Leads; Body 7.9 x 5.9 mm, inc. leads (LxW)"
  rect 2.4x3.3 smd: 1(-3.475,0) 2(3.475,0)
  silkscreen extent -5.08,-2.05 5.42,2.06
SPM15-033-Q48N-C [mm] "Isolated Module DC DC Converter 1 Output 3.3V 4.5A 18V - 75V Input, 6-DIP Module"
  round 3 hole 1.575: 1(-10.16,-2.54) 2(-10.16,2.54) 3(10.16,-10.16) 4(10.16,0) 5(10.16,10.16) 6(-10.16,10.16)
  silkscreen extent -12.96,-12.96 12.96,12.96
SPM15-050-Q12P-C [mm] "Isolated Module DC DC Converter 1 Output 5V 3A 9V - 36V Input, 6-DIP Module"
  round 3 hole 1.575: 1(-10.16,-2.54) 2(-10.16,2.54) 3(10.16,-10.16) 4(10.16,0) 5(10.16,10.16) 6(-10.16,10.16)
  silkscreen extent -12.96,-12.96 12.96,12.96
UJ_5 [mil]
  rect 52x22 smd: 1(-46,37.4) 2(-46,0) 3(-46,-37.4) 4(46,-37.4) 5(46,37.4)
  silkscreen extent -10,-57 32,57, body extent -55,-57 55,57, height 39
UWE-24/3-Q12 [mm] "Isolated Module DC DC Converter 1 Output 24V 3A 9V - 36V Input, 8-DIP Module, 1/8 Brick"
  round 2.5 hole 1.022: 1(-25.4,7.62) 2(-25.4,0) 3(-25.4,-7.62) 5(25.4,-3.81) 6(25.4,0) 7(25.4,3.81)
  round 3.5 hole 1.572: 4(25.4,-7.62) 8(25.4,7.62)
  silkscreen extent -29.2,-11.5 29.2,11.4

## Part data
B1: library part PushButton
C1 C2 C3 C4 C5 C6 C7 C10 C11 C12 C13 C14 C15 C16 C17: library part Cap, "Capacitor"
C8 C9 C38_SolenoidDriver1 C38_SolenoidDriver2 C38_SolenoidDriver3 C38_SolenoidDriver4 C38_SolenoidDriver5: "Capacitor", Voltage=100V
  C8 C9: LatestRevisionDate=17-Jul-2002, LatestRevisionNote="Re-released for DXP Platform.", PackageDescription="Radial Cap, Thru-Hole; 2 Leads; 0.3 in Pin Spacing", PackageReference=RAD-0.3, Published=8-Jun-2000, Publisher="Altium Limited"
C36 C37_Thermocouple_Amplifier1 C37_Thermocouple_Amplifier2 C37_Thermocouple_Amplifier3 C37_Thermocouple_Amplifier4 C39_SolenoidDriver1 C39_SolenoidDriver2 C39_SolenoidDriver3 C39_SolenoidDriver4 C39_SolenoidDriver5: "Capacitor"
D1_SolenoidDriver1 D1_SolenoidDriver2 D1_SolenoidDriver3 D1_SolenoidDriver4 D1_SolenoidDriver5: "Default Diode"
J1: library part "Micro-Fit 16Pos", "Molex MicroFit 16-Pos Connector", DigiKey PN=WM10719-ND, URL=https://www.digikey.com/product-detail/en/molex-llc/0430451628/WM10719-ND/3310256
J2 J3 J7 J8: library part "Micro-Fit 8Pos", "Molex MicroFit 8-Pos Connector", DigiKey PN=WM2651-ND, URL=https://www.digikey.com/products/en?WT.z_cid=sp_900_0310_buynow&keywords=430450813
J4: library part "Mega-Fit 10Pos", "Molex MegaFit 10-Pos Connector", DigiKey PN=WM11979-ND, URL=https://www.digikey.com/product-detail/en/molex-llc/0768290010/WM11979-ND/5639621
J5 J6: "Header, 4-Pin", LatestRevisionDate=17-Jul-2002, LatestRevisionNote="Re-released for DXP Platform.", Publisher="Altium Limited"
J9: library part "Mega-Fit 2Pos", "Molex MegaFit 2-Pos Connector", DigiKey PN=WM11979-ND, URL=https://www.digikey.com/product-detail/en/molex-llc/0768290010/WM11979-ND/5639621
Q1_SolenoidDriver1 Q1_SolenoidDriver2 Q1_SolenoidDriver3 Q1_SolenoidDriver4 Q1_SolenoidDriver5: "N-Channel MOSFET", ComponentLink1Description="DigiKey URL", ComponentLink1URL=https://www.digikey.com/product-detail/en/infineon-technologies/IRFZ34NSTRLPBF/IRFZ34NSTRLPBFCT-ND/2441060, DigiKey PN=IRFZ34NSTRLPBFCT-ND
R1 R2 R3 R4 R13 R19_SolenoidDriver1 R19_SolenoidDriver2 R19_SolenoidDriver3 R19_SolenoidDriver4 R19_SolenoidDriver5 R20_SolenoidDriver1 R20_SolenoidDriver2 R20_SolenoidDriver3 R20_SolenoidDriver4 R20_SolenoidDriver5: "Resistor"
S1 S2: library part UWE-24/3-Q12PB-C, "CONV DC/DC 72W 24V 3A", Link=https://www.digikey.com/product-detail/en/murata-power-solutions-inc/UWE-24-3-Q12PB-C/811-2236-5-ND/2346086
S3: library part SPM15-050-Q12P-C, "DC/DC CONVERTER 5V 15W", Link=https://www.digikey.com/product-detail/en/murata-power-solutions-inc/SPM15-050-Q12P-C/811-2909-5-ND/4693860
S4: library part SPM15-033-Q12P-C, "DC/DC CONVERTER 3.3V 15W", Link=https://www.digikey.com/product-detail/en/murata-power-solutions-inc/SPM15-033-Q12P-C/811-2907-5-ND/4693858
SB1_Thermocouple_Amplifier1 SB1_Thermocouple_Amplifier2 SB1_Thermocouple_Amplifier3 SB1_Thermocouple_Amplifier4 SB2_Thermocouple_Amplifier1 SB2_Thermocouple_Amplifier2 SB2_Thermocouple_Amplifier3 SB2_Thermocouple_Amplifier4 SB3_Thermocouple_Amplifier1 SB3_Thermocouple_Amplifier2 SB3_Thermocouple_Amplifier3 SB3_Thermocouple_Amplifier4: library part Jumper, "Jumper Wire"
U2: library part BeagleBone_Black, "P9 Header of a BeagleBone Black"
U3 U4: "Imported", Type=Type
  U3: RefDes=RefDes
  U4: Manufacturer_Part_Number=ADR391AUJZ-R2, RefDes=Refdes, Vendor=Vendor
U5_Thermocouple_Amplifier1 U5_Thermocouple_Amplifier2 U5_Thermocouple_Amplifier3 U5_Thermocouple_Amplifier4: library part MAX31855x, Manufacturer PN=MAX31855EASA+, DigiKey PN=MAX31855EASA+-ND, Thermocouple Type=E
U6: "Imported", Manufacturer_Part_Number=ltc4151ims-1#pbf, C="Copyright (C) 2016 Accelerated Designs. All rights reserved", Copyright="Copyright (C) 2016 Accelerated Designs. All rights reserved", RefDes=RefDes, Type=Type, Vendor="Linear Technology"
U7_SolenoidDriver1 U7_SolenoidDriver2 U7_SolenoidDriver3 U7_SolenoidDriver4 U7_SolenoidDriver5: library part LT1910ES8#PBF, Manufacturer_Part_Number=lt1910es8#pbf, DigiKey PN=LT1910ES8#TRPBFCT-ND, RefDes=RefDes, Type=Type, Vendor="Linear Technology"
X1: "Crystal Oscillator", Frequency="8 MHz"

## Free pads (board coordinates)
  round 200 hole 116: MOUNT(265,600) MOUNT(1002,4550) MOUNT(3638,2561) MOUNT(5700,600) MOUNT(5700,4550)

## Via types
v1: diameter 25, hole 12, Top to Bottom, tented both sides, 50 vias
v2: diameter 22, hole 12, Top to Bottom, tented both sides, 45 vias
v3: diameter 50, hole 28, Top to Bottom, 16 vias
v4: diameter 40, hole 20, Top to Bottom, tented both sides, 15 vias
v5: diameter 30, hole 12, Top to Bottom, tented both sides, 14 vias
v6: diameter 35, hole 20, Top to Bottom, tented both sides, 10 vias
v7: diameter 30, hole 18, Top to Bottom, tented both sides, 4 vias

## Nets (pads, with @x,y where several pads share a name; then routed paths per layer and width w, separated by ;. In a path a pad name is that pad's centre, name@x,y a point inside that pad or via, vN(x,y) a via of type N, cw(c..) or ccw(c..) an arc to the next point about the centre after c; other vN are vias at no path point)
3V3: C1.2 C2.2 C3.2 C4.2 C5.2 C6.2 C7.2 C19.2 C20.2 C22.2 C23.2 C35.2 C37_Thermocouple_Amplifier1.2 C37_Thermocouple_Amplifier2.2 C37_Thermocouple_Amplifier3.2 C37_Thermocouple_Amplifier4.2 FB1.2 J3.1 J3.2 J5.1 J6.1 J8.2 J8.6 R3.1 R13.2 R17.1 R18.1 R19_SolenoidDriver1.2 R19_SolenoidDriver2.2 R19_SolenoidDriver3.2 R19_SolenoidDriver4.2 R19_SolenoidDriver5.2 S4.3 U1.6 U1.11 U1.19 U1.28 U1.50 U1.75 U1.100 U3.21 U3.22 U4.1 U4.2 U5_Thermocouple_Amplifier1.4 U5_Thermocouple_Amplifier2.4 U5_Thermocouple_Amplifier3.4 U5_Thermocouple_Amplifier4.4 | length 8015.2
  Top w10: v1(1860,3531) 1894,3531 1900,3525 R13.2@1900,3492 ; R18.1@2199,2825 v2(2199,2860) R17.1@2199,2892
  POWER w10: 2420,3256 2528,3256 ; 2423,3355 2528,3355 ; 2425,3557 2528,3557 ; 2426,2855 2528,2855 ; 2433,3757 2528,3757 ; 2433,3955 2528,3955 ; 2437,3857 2528,3857 ; 2437,4257 2528,4257 ; 2438,4357 2528,4357 ; 2439,3458 2528,3458 ; 2439,4457 2528,4457 ; 2440,3154 2438,3156 2528,3156 ; 2440,3655 2528,3655 ; 2440,4056 2528,4056 ; 2441,3055 2528,3055 ; 2446,2955 2528,2955 ; 2446,4154 2528,4154 ; 2604,3757 2528,3757 ; 2606,3557 2528,3557 ; 2610,4257 2528,4257 ; 2611,3355 2528,3355 ; 2615,3256 2528,3256 ; 2617,3156 2528,3156 ; 2617,3655 2528,3655 ; 2617,3955 2528,3955 ; 2621,3055 2528,3055 ; 2623,4357 2528,4357 ; 2624,2955 2528,2955 ; 2624,4056 2528,4056 ; 2628,4457 2528,4457 ; 2631,3857 2528,3857 ; 2634,3458 2528,3458 ; 2650,4154 2528,4154 ; 2690,2855 2528,2855 ; 2528,2855 2528,2955 ; 2528,2955 2528,3055 ; 2528,3055 2528,3156 ; 2528,3156 2528,3256 ; 2528,3256 2528,3355 ; 2528,3355 2528,3458 ; 2528,3458 2528,3557 ; 2528,3557 2528,3655 ; 2528,3655 2528,3757 ; 2528,3757 2528,3857 ; 2528,3857 2528,3955 ; 2528,3955 2528,4056 ; 2528,4056 2528,4154 ; 2528,4154 2528,4257 ; 2528,4257 2528,4357 ; 2528,4357 2528,4457
  POWER w40: 5375,2227 S4.3@5486,2227 ; 5486,2123 S4.3@5486,2227 ; 5486,2357 S4.3@5486,2227 ; 5578,2227 S4.3@5486,2227
  Bottom w10: U3.22@1148,3778.43 1184.57,3778.43 1199,3764 C23.2@1227,3764 1227,3790 1212.98,3804.02 U3.21@1148,3804.02 ; 1227,3736 1228,3735 1343,3735 ; R3.1@1304.13,3415.26 v1(1304.13,3455) ; C2.2@1375,3533.37 v1(1417,3533.37) U1.100@1472.91,3533.37 ; C3.2@1511.78,2918 v1(1539.83,2946.05) U1.75@1539.83,2994 ; U1.6@1638.26,3600.3 C1.2@1638.26,3705.13 ; C7.2@1708,3713 1713,3708 1713,3659.73 1736.69,3636.05 U1.11@1736.69,3600.3 ; C6.2@1846,3706.13 1846,3694 1894.17,3645.83 U1.19@1894.17,3600.3 1894.17,3547.17 1878,3531 v1(1860,3531) ; v1(2013,3100) 2013,3083 2035.07,3060.93 U1.50@2079.2,3060.93 2149.07,3060.93 C4.2@2163,3047 ; U1.28@2079.2,3494 v1(2135.67,3494) C5.2@2192.13,3494
  Bottom w15: C37_Thermocouple_Amplifier4.2@421,2623 452,2592 U5_Thermocouple_Amplifier4.4@514.95,2592 ; C37_Thermocouple_Amplifier3.2@421,2836 v2(455,2836) U5_Thermocouple_Amplifier3.4@514.95,2836 ; C37_Thermocouple_Amplifier2.2@421,3080 v2(455,3080) U5_Thermocouple_Amplifier2.4@514.95,3080 ; C37_Thermocouple_Amplifier1.2@421,3324 v2(456,3324) U5_Thermocouple_Amplifier1.4@514.95,3324 ; v2(1422,2321) R19_SolenoidDriver1.2@1422,2368 ; v2(1523,2389) 1545,2389 1547,2391 ; R19_SolenoidDriver3.2@1547,2353 1547,2391 ; R19_SolenoidDriver2.2@1547,2409 1547,2391 ; v2(1635,2316) R19_SolenoidDriver4.2@1635,2352 ; v2(1730,2316) R19_SolenoidDriver5.2@1730,2353 ; FB1.2@2148,3769.13 v1(2148,3805)
  Bottom w20: C22.2@1227,3705 1227,3736 C23.2@1227,3764 ; U4.2@1254,3972 U4.2@1254,3971.35 U4.1@1254,3933.94 v1(1254,3903) C35.2@1283,3874 ; C19.2@1343,3706 1343,3735 C20.2@1343,3765
  Bottom w40: 5385,2227 S4.3@5486,2227 ; 5486,2117 S4.3@5486,2227 ; 5486,2343 S4.3@5486,2227 ; 5634,2227 S4.3@5486,2227
  other v2: 452,2594
5V: J1.3 J1.7 J1.11 J1.15 J3.3 J3.4 S3.3 U2.5 U2.6 | length 116
  Top w20: 2409,4661 2409.33,4660.67 ; 2424,4760 2430,4754 ; 2430,4463 2435,4458 ; U2.6@2477.13,4605.67 U2.5@2577.13,4605.67
24V: C38_SolenoidDriver1.2 C38_SolenoidDriver2.2 C38_SolenoidDriver3.2 C38_SolenoidDriver4.2 C38_SolenoidDriver5.2 J3.7 J3.8 R20_SolenoidDriver1.2 R20_SolenoidDriver2.2 R20_SolenoidDriver3.2 R20_SolenoidDriver4.2 R20_SolenoidDriver5.2 S1.7 S1.8 S2.7 S2.8 U7_SolenoidDriver1.8 U7_SolenoidDriver2.8 U7_SolenoidDriver3.8 U7_SolenoidDriver4.8 U7_SolenoidDriver5.8 | length 3127.4
  POWER w40: S1.8@275,2323 360,2323 ; 360,2255 360,2323 ; 360,2382 360,2323 ; S1.7@425,2323 360,2323 ; S2.8@2918,2225 3005,2225 ; 3005,2107 3005,2225 ; 3005,2278 3005,2225 ; S2.7@3068,2225 3005,2225
  Bottom w20: U7_SolenoidDriver1.8@465,1861.28 465,1775 579.05,1660.95 C38_SolenoidDriver1.2@628,1660.95 ; U7_SolenoidDriver2.8@1250,1861.28 1250,1775 1364.05,1660.95 C38_SolenoidDriver2.2@1413,1660.95 ; U7_SolenoidDriver3.8@2035,1861.28 2035,1775 2149.05,1660.95 C38_SolenoidDriver3.2@2198,1660.95 ; U7_SolenoidDriver4.8@2820,1861.28 2820,1775 2934.05,1660.95 C38_SolenoidDriver4.2@2983,1660.95 ; U7_SolenoidDriver5.8@3605,1861.28 3605,1775 3719.05,1660.95 C38_SolenoidDriver5.2@3768,1660.95
  Bottom w40: C38_SolenoidDriver1.2@628,1660.95 761.05,1660.95 R20_SolenoidDriver1.2@815,1607 ; C38_SolenoidDriver2.2@1413,1660.95 1546.05,1660.95 R20_SolenoidDriver2.2@1600,1607 ; C38_SolenoidDriver3.2@2198,1660.95 2331.05,1660.95 R20_SolenoidDriver3.2@2385,1607 ; C38_SolenoidDriver4.2@2983,1660.95 3116.05,1660.95 R20_SolenoidDriver4.2@3170,1607 ; C38_SolenoidDriver5.2@3768,1660.95 3901.05,1660.95 R20_SolenoidDriver5.2@3955,1607
  other v4: 777,1644 1562,1644 2347,1644 3132,1644 3917,1644 711,1661 1496,1661 2281,1661 3066,1661 3851,1661
36V: C8.2 C9.2 R14.2 R15.2 R16.2 S1.1 S2.1 S3.1 S4.1 U6.10 | length 9833.8
  Top w140: S1.1@275,323 460,138 2831,138 S2.1@2918,225
  POWER w150: S1.1@275,323 454,144 2837,144
  Bottom w10: 4328,550 U6.10@4328,716.92
  Bottom w20: R15.2@4278.69,508 4278.69,562 R16.2@4278.69,616
  Bottom w30: C9.2@4722,827 4722,745 4723,744
  Bottom w100: 5114,582 5222,474 S3.1@5222,230 ; S4.1@5186,1427 5315,1298 5315,545
  Bottom w150: S1.1@275,323 455,143 2836,143 S2.1@2918,225
  other v3: 4521,420 4621,420 4721,420 4821,420 4471,520 4571,520 4671,520 4771,520 4871,520 4521,620 4621,620 4721,620 4821,620 4471,720 4571,720 4671,720
BOOT0: R3.2 U1.94 | length 105.8
  Bottom w10: R3.2@1367.13,3415.26 U1.94@1472.91,3415.26
BOOT1: R4.2 U1.37 | length 105.9
  Bottom w10: U1.37@2079.2,3316.83 R4.2@2185.13,3316.83
Gate_SolenoidDriver1: Q1_SolenoidDriver1.2 U7_SolenoidDriver1.5 | length 593.1
  Bottom w20: U7_SolenoidDriver1.5@315,1861.28 271,1817.28 271,1448.93 Q1_SolenoidDriver1.2@385.93,1334
Gate_SolenoidDriver2: Q1_SolenoidDriver2.2 U7_SolenoidDriver2.5 | length 593.1
  Bottom w20: U7_SolenoidDriver2.5@1100,1861.28 1056,1817.28 1056,1448.93 Q1_SolenoidDriver2.2@1170.93,1334